# EAGLE board selector_wheel_1 (EAGLE 7.3.0)
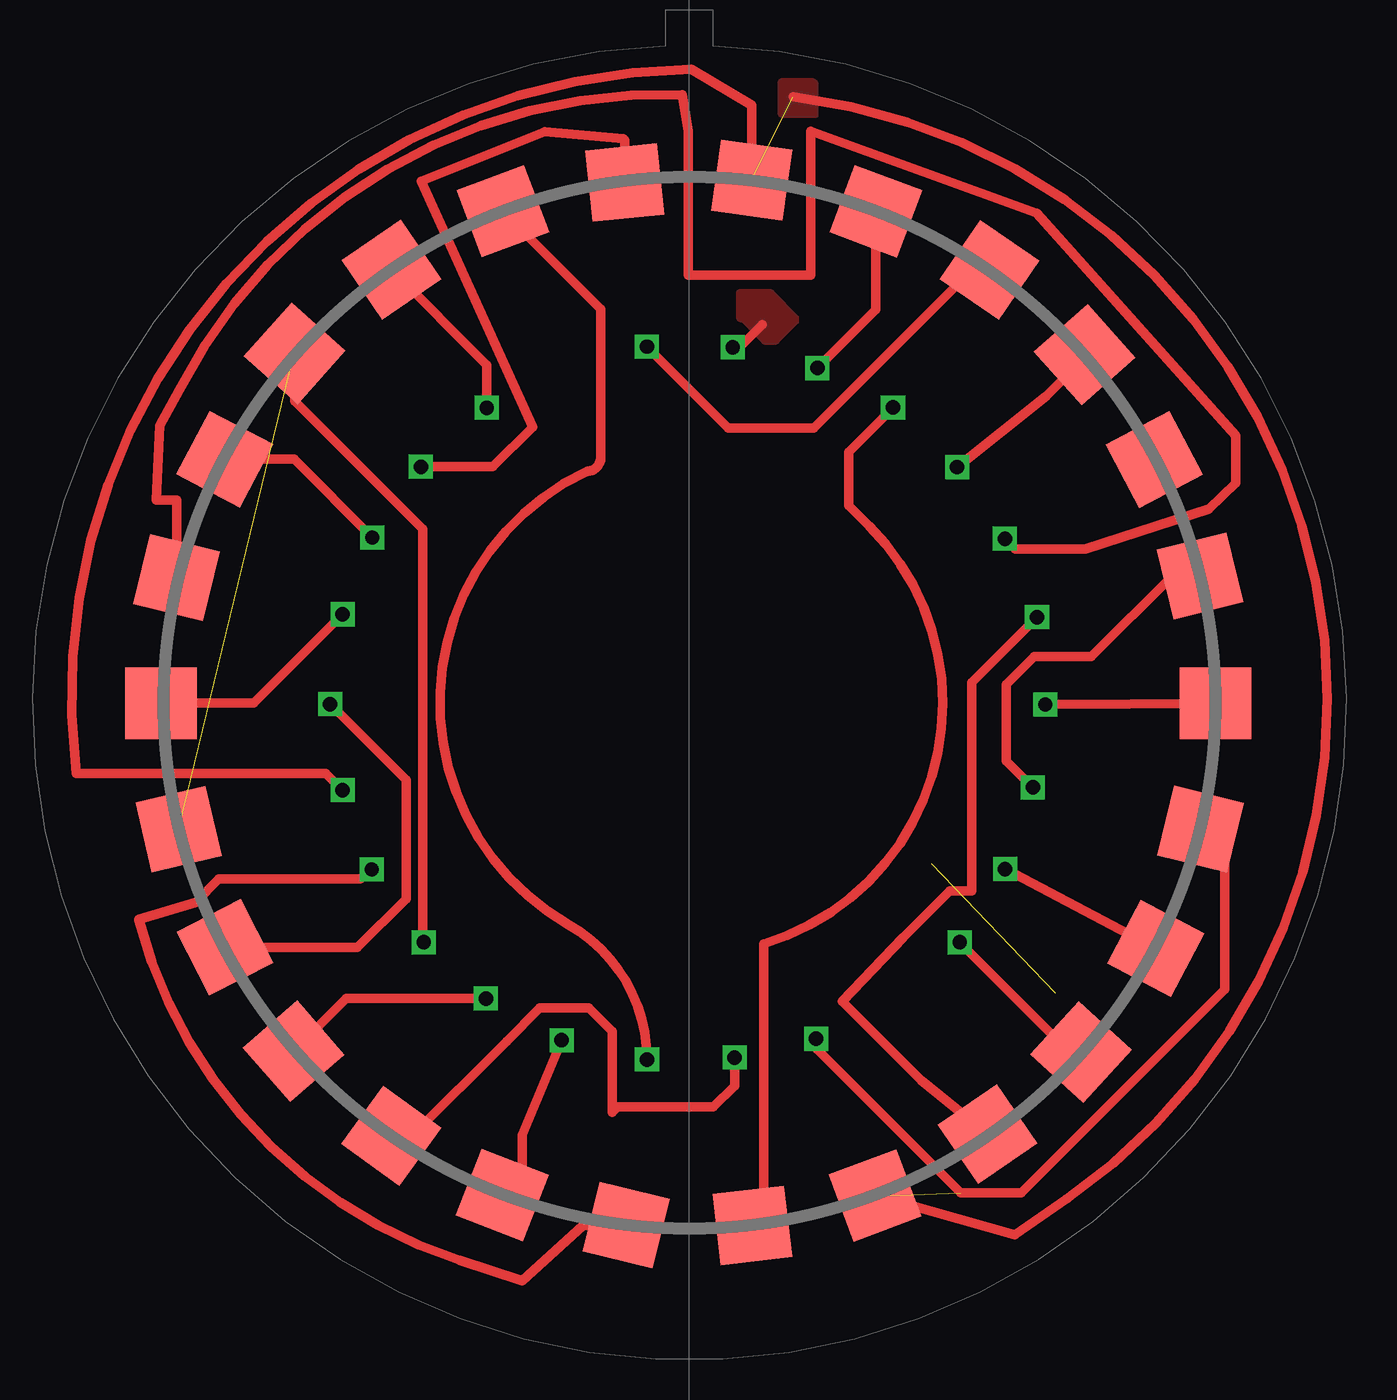
[diagram p0: board, top side]
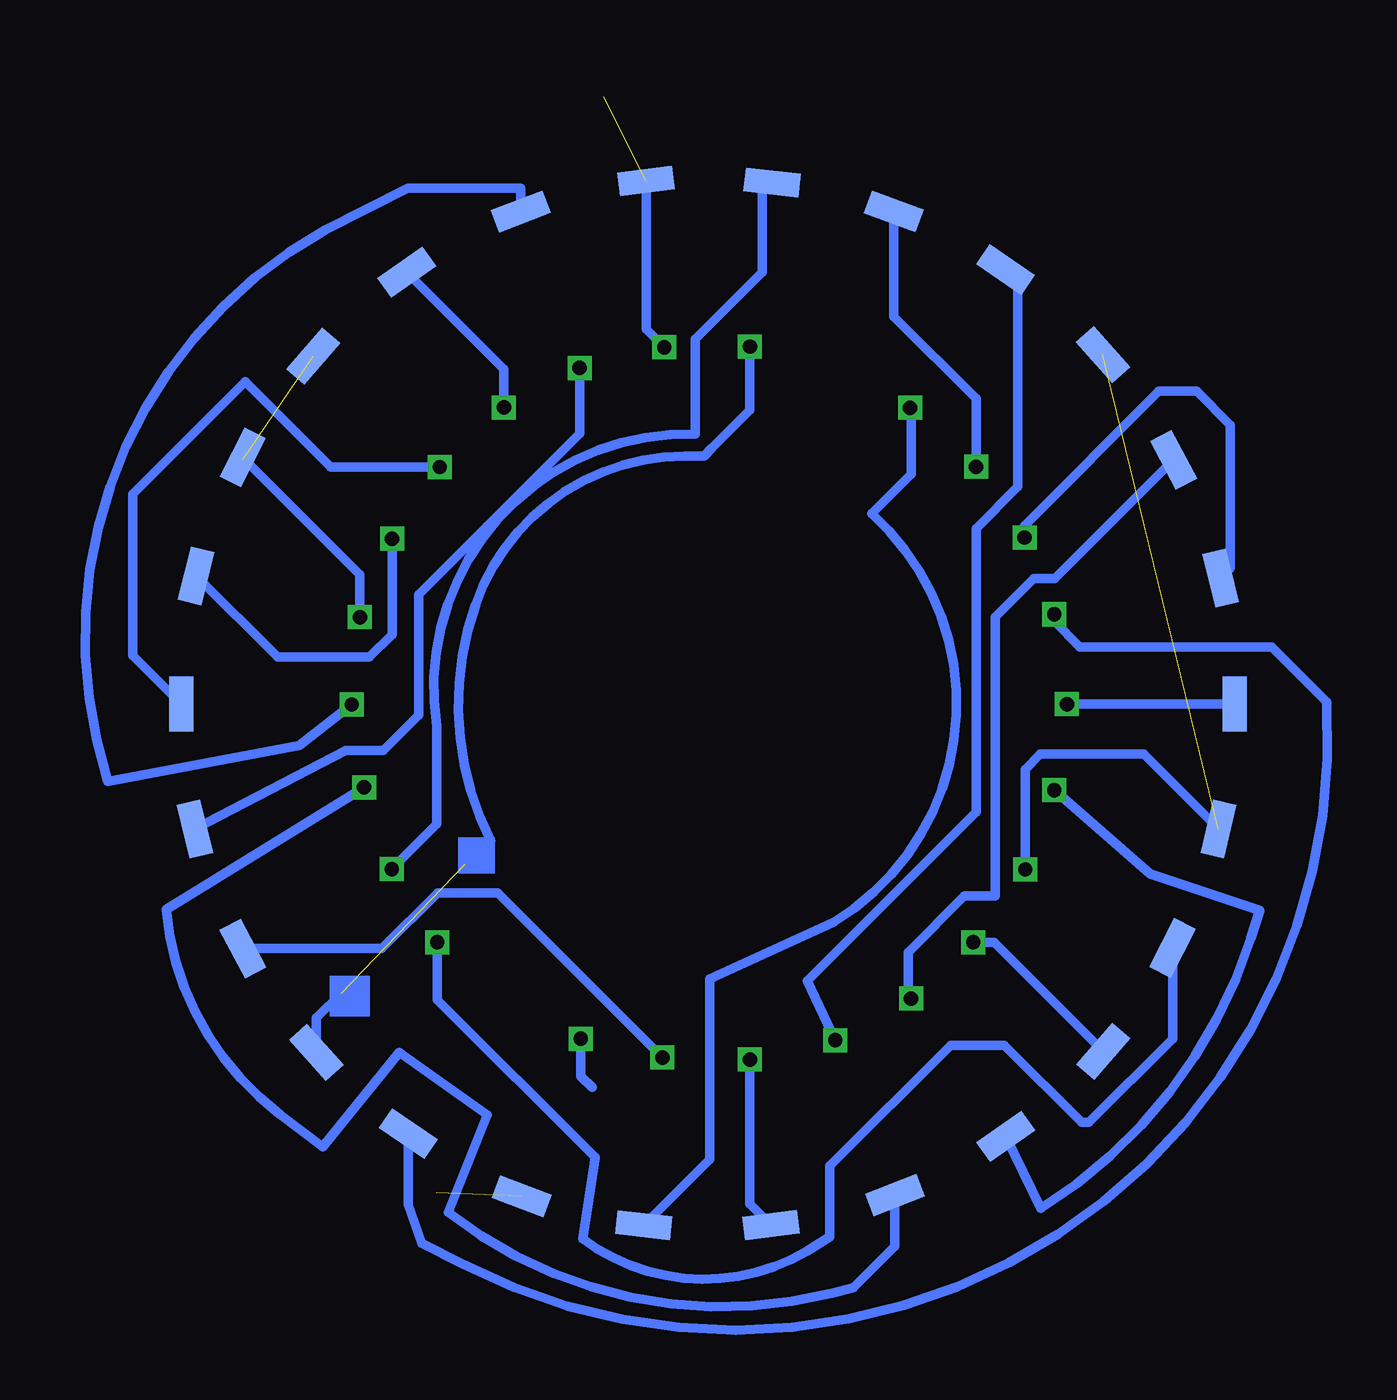
[diagram p1: board, bottom side, seen from below]

No outline drawn. Coordinates in mm, seen from the top.
Copper layers (1*16): Top 0.035mm / dielectric 1.5mm / Bottom 0.035mm
Design rules "default": minimum track width 10mil, minimum drill 24mil, track to track 8mil, track to pad 8mil, pad to pad 8mil, via to via 8mil, smd to smd 8mil, copper to edge 40mil, drill to drill 8mil, minimum pad ring 10mil, minimum via ring 8mil, stop-mask expansion 4mil, vias tented up to drill 0mil, thermal gap 10mil

## Footprints (pad centres in the part's own frame; a part is rotated, then mirrored left to right if it is on the bottom)
CONTACT = smd 3 x 3: P$1 0,0
SPRING = smd 2.3 x 1: P$1 0,0

## Placement (x,y rotation side)
U$1  CONTACT  [CONTACT]  52.01,29.97 0 top
U$2  CONTACT  [CONTACT]  51.36,35.31 103.9 top
U$3  CONTACT  [CONTACT]  49.44,40.18 117.8 top
U$4  CONTACT  [CONTACT]  46.53,44.57 41.7 top
U$5  CONTACT  [CONTACT]  42.56,48.11 145.6 top
U$6  CONTACT  [CONTACT]  37.8,50.56 69.5 top
U$7  CONTACT  [CONTACT]  7.89,29.98 0 top
U$8  CONTACT  [CONTACT]  27.29,51.77 95.9 top
U$9  CONTACT  [CONTACT]  49.51,19.71 332.2 top
U$10  CONTACT  [CONTACT]  51.38,24.71 346.1 top
U$11  CONTACT  [CONTACT]  46.38,15.37 137.6 top
U$12  CONTACT  [CONTACT]  42.48,11.95 304.4 top
U$13  CONTACT  [CONTACT]  32.64,8.13 276.6 top
U$14  CONTACT  [CONTACT]  37.77,9.38 290.5 top
U$15  CONTACT  [CONTACT]  22.17,9.39 248.8 top
U$16  CONTACT  [CONTACT]  27.36,8.14 346.1 top
U$17  CONTACT  [CONTACT]  13.44,15.42 221 top
U$18  CONTACT  [CONTACT]  17.53,11.87 54.2 top
U$19  CONTACT  [CONTACT]  17.54,48.12 304.4 top
U$20  CONTACT  [CONTACT]  22.2,50.57 290.5 top
U$21  CONTACT  [CONTACT]  13.48,44.62 318.3 top
U$22  CONTACT  [CONTACT]  10.56,40.19 332.2 top
U$23  CONTACT  [CONTACT]  8.63,24.71 193.2 top
U$24  CONTACT  [CONTACT]  8.54,35.23 346.1 top
U$25  CONTACT  [CONTACT]  10.57,19.76 207.1 top
U$26  CONTACT  [CONTACT]  32.61,51.86 82 top
U$27  SPRING  [SPRING]  52.02,29.95 90 bottom
U$28  SPRING  [SPRING]  51.39,35.31 76.1 bottom
U$29  SPRING  [SPRING]  49.45,40.27 242.9 bottom
U$30  SPRING  [SPRING]  46.5,44.51 229 bottom
U$31  SPRING  [SPRING]  42.59,48.02 215.1 bottom
U$32  SPRING  [SPRING]  37.81,50.56 201.2 bottom
U$33  SPRING  [SPRING]  7.94,29.94 90 bottom
U$34  SPRING  [SPRING]  27.3,51.77 353.4 bottom
U$35  SPRING  [SPRING]  49.44,19.71 117.8 bottom
U$36  SPRING  [SPRING]  51.45,24.71 103.9 bottom
U$37  SPRING  [SPRING]  46.37,15.36 131.7 bottom
U$38  SPRING  [SPRING]  42.52,11.96 145.6 bottom
U$39  SPRING  [SPRING]  32.67,8.13 173.4 bottom
U$40  SPRING  [SPRING]  37.78,9.34 159.5 bottom
U$41  SPRING  [SPRING]  22.16,9.39 201.2 bottom
U$42  SPRING  [SPRING]  27.35,8.14 187.3 bottom
U$43  SPRING  [SPRING]  13.45,15.41 229 bottom
U$44  SPRING  [SPRING]  17.53,11.85 215.1 bottom
U$45  SPRING  [SPRING]  17.54,48.12 145.6 bottom
U$46  SPRING  [SPRING]  22.21,50.56 159.5 bottom
U$47  SPRING  [SPRING]  13.46,44.57 131.7 bottom
U$48  SPRING  [SPRING]  10.5,40.17 117.8 bottom
U$49  SPRING  [SPRING]  8.62,24.71 256.8 bottom
U$50  SPRING  [SPRING]  8.54,35.22 103.9 bottom
U$51  SPRING  [SPRING]  10.55,19.74 242.9 bottom
U$52  SPRING  [SPRING]  32.57,51.84 187.3 bottom

## Library data of the parts
U$1-U$52 = enigma

## Nets
N$1: U$4.P$1 U$27.P$1
N$2: U$1.P$1 U$32.P$1
N$3: U$25.P$1 U$33.P$1
N$4: U$20.P$1 U$42.P$1
N$5: U$9.P$1 U$34.P$1
N$6: U$11.P$1 U$51.P$1
N$7: U$18.P$1 U$35.P$1
N$8: U$22.P$1 U$50.P$1
N$9: U$13.P$1 U$31.P$1
N$10: U$24.P$1 U$28.P$1
N$11: U$12.P$1 U$29.P$1
N$12: U$3.P$1 U$30.P$1
N$13: U$6.P$1 U$36.P$1
N$14: U$5.P$1 U$37.P$1
N$15: U$7.P$1 U$38.P$1
N$16: U$19.P$1 U$39.P$1
N$17: U$10.P$1 U$40.P$1
N$18: U$2.P$1 U$41.P$1
N$19: U$21.P$1 U$43.P$1
N$20: U$26.P$1 U$44.P$1
N$21: U$15.P$1 U$45.P$1
N$22: U$8.P$1 U$46.P$1
N$23: U$23.P$1 U$47.P$1
N$24: U$17.P$1 U$48.P$1
N$25: U$16.P$1 U$49.P$1
N$26: U$14.P$1 U$52.P$1

## Tracks (layer width: path | path; a pad name or v marks a point on that pad's centre or on a via)
N$1  (via drill 0.6)
  Top 0.406: U$4.P$1 45.89,43.92 45.89,43.8 44.92,42.84 v41.2,39.86
  Bottom 0.406: U$27.P$1 54.04,31.97 54.04,37.48 54.04,38.73 49.33,43.44 45.76,39.86 v41.2,39.86
N$2  (via drill 0.6)
  Top 0.406: v44.89,29.93 U$1.P$1
  Bottom 0.406: U$32.P$1 37.81,51.53 42.55,51.53 45.97,49.79 arc-79 55.09,26.71 47.09,28.2 v44.89,29.93
N$3  (via drill 0.6)
  Top 0.406: v14.97,29.94 18.14,26.76 18.14,21.79 16.11,19.76 U$25.P$1
  Bottom 0.406: U$33.P$1 v14.97,29.94
N$4  (via drill 0.6)
  Top 0.406: v28.23,15.07 arc60 24.96,20.7 arc-125 25.7,39.68 arc90 26.3,40.28 26.3,45.1 26.3,46.47 U$20.P$1
  Bottom 0.406: U$42.P$1 28.23,9.02 v28.23,15.07
N$5  (via drill 0.6)
  Top 0.406: U$9.P$1 v43.21,23.04
  Bottom 0.406: U$34.P$1 27.71,51.36 27.71,48.03 30.52,45.22 30.52,41.23 arc-101 41.33,29.02 41.33,24.92 v43.21,23.04
N$6  (via drill 0.6)
  Top 0.406: v41.31,19.97 45.91,15.37 U$11.P$1
  Bottom 0.406: U$51.P$1 10.55,15.93 14.04,12.43 14.35,12.43 17.59,15.67 19.82,15.67 24.89,10.61 24.89,7.64 25.84,7.04 arc67 35.23,7.56 34.7,10.97 41.31,17.57 v41.31,19.97
N$7  (via drill 0.6)
  Top 0.406: U$18.P$1 18.39,11.87 22.36,15.84 23.75,17.23 25.78,17.23 26.77,16.23 26.77,12.86 27,13.08 31,13.08 31.89,13.97 v31.89,15.15
  Bottom 0.406: v31.89,15.15 38.78,22.03 41.3,22.03 43.62,19.71 U$35.P$1
N$8  (via drill 0.6)
  Top 0.406: U$22.P$1 13.46,40.19 v16.73,36.91
  Bottom 0.406: v16.73,36.91 16.73,37.42 11.12,43.03 9.54,43.03 8.13,41.62 8.13,35.63 U$50.P$1
N$9  (via drill 0.6)
  Top 0.406: v38.52,42.36 36.66,40.5 36.66,38.33 36.66,38.26 37.52,37.4 arc-118 33.12,19.91 33.12,8.44 32.64,8.44 U$13.P$1
  Bottom 0.406: U$31.P$1 38.52,43.96 v38.52,42.36
N$10  (via drill 0.6)
  Top 0.406: U$24.P$1 8.54,38.47 7.69,38.47 7.83,41.6 8.66,43.08 arc-65 29.71,55.45 29.96,53.92 29.96,47.88 35.08,47.88 35.08,53.92 44.53,50.5 52.87,41.18 52.87,39.2 51.72,38.1 46.56,36.44 43.63,36.44 v43.2,36.87
  Bottom 0.406: v43.2,36.87 43.2,32.85 44.15,31.9 47.99,31.9 U$28.P$1
N$11  (via drill 0.6)
  Top 0.406: v44.54,33.58 41.82,30.85 41.82,22.12 40.88,22.12 38.94,20.18 36.4,17.49 39.7,14.19 42.25,12.12 41.97,11.85 42.38,11.85 U$12.P$1
  Bottom 0.406: v44.54,33.58 44.54,35.37 U$29.P$1
N$12  (1 unrouted)
N$13  (via drill 0.6)
  Top 0.406: U$6.P$1 37.8,46.46 v35.35,44.01
  Bottom 0.406: v35.35,44.01 35.35,41.25 39.24,37.36 42.08,34.53 42.08,29.49 43.57,28 45.15,28 U$36.P$1
N$14  (via drill 0.6)  (1 unrouted)
  Top 0.406: U$5.P$1 41.82,48.11 35.21,41.5 31.64,41.5 v28.23,44.91
  Bottom 0.406: v28.23,44.91 28.23,42.25 29.83,40.65 30.13,40.31 30.95,40.31 arc-71 39.71,34.12 arc-46 39.08,24.21 39.18,24.21 40.14,23.25 | U$37.P$1 46.37,16.8 45.33,17.84
N$15  (via drill 0.6)
  Top 0.406: v15.49,33.7 11.77,29.98 U$7.P$1
  Bottom 0.406: U$38.P$1 42.52,8.98 41.95,7.38 40.26,6.51 arc-121 4.09,30.02 6.41,32.34 14.42,32.34 15.49,33.41 v15.49,33.7
N$16  (via drill 0.6)
  Top 0.406: v21.52,42.34 21.52,44.14 U$19.P$1
  Bottom 0.406: U$39.P$1 29.91,10.89 29.91,18.44 24.73,20.81 arc-107 23.14,37.92 21.48,39.57 21.48,42.3 v21.52,42.34
N$17  (via drill 0.6)  (1 unrouted)
  Top 0.406: U$10.P$1 52.41,23.69 52.41,18.62 52.41,18.01 43.88,9.48 41.36,9.48 35.35,15.49 35.35,15.89 v35.3,15.94
  Bottom 0.406: U$40.P$1 37.77,9.38 | v35.3,15.94 35.3,14.37 34.83,13.89
N$18  (via drill 0.6)
  Top 0.406: v44.37,26.46 43.27,27.56 43.27,30.77 44.42,31.92 46.82,31.92 50.2,35.3 U$2.P$1
  Bottom 0.406: U$41.P$1 22.16,7.24 23.89,5.51 24.81,5.28 arc52 40.85,8.66 39.23,12.75 42.9,15.37 46.1,11.42 47.89,12.78 arc48 52.65,21.35 v44.37,26.46
N$19  (via drill 0.6)
  Top 0.406: v18.88,19.97 18.84,20.01 18.84,37.26 13.48,42.62 U$21.P$1
  Bottom 0.406: U$43.P$1 18.01,19.97 v18.88,19.97
N$20  (via drill 0.6)
  Top 0.406: U$26.P$1 32.61,55.02 30.08,56.5 arc96 4.35,27.04 14.79,27.04 v15.49,26.34
  Bottom 0.406: v15.49,26.34 11.49,22.83 6.9,21.3 7.27,20.14 arc40 16.07,8.84 U$44.P$1
N$21  (via drill 0.6)
  Top 0.406: U$15.P$1 23.01,10.23 23.01,11.91 v24.66,15.87
  Bottom 0.406: U$45.P$1 17.02,47.6 17.02,39.04 18.77,37.29 18.77,25.42 25.83,18.36 v24.66,15.87
N$22  (via drill 0.6)
  Top 0.406: v18.77,39.88 21.78,39.88 23.44,41.54 18.77,51.82 23.95,53.89 27.23,53.6 27.29,53.54 U$8.P$1
  Bottom 0.406: U$46.P$1 22.21,46.16 18.77,42.72 v18.77,39.88
N$23  (1 unrouted)
N$24  (via drill 0.6)
  Top 0.406: v21.48,17.62 15.64,17.62 U$17.P$1
  Bottom 0.406: U$48.P$1 15.47,35.2 16.36,35.2 17.97,33.58 17.97,21.92 19.25,21.92 21.61,19.56 21.61,17.74 v21.48,17.62
N$25  (via drill 0.6)
  Top 0.406: v16.71,23.02 16.73,23.13 16.22,22.63 10.32,22.63 9.34,21.65 6.95,20.93 arc57 20.39,6.66 23,5.8 25.57,8.14 U$16.P$1
  Bottom 0.406: v16.71,23.02 16.71,27.21 16.07,27.84 11.76,27.84 U$49.P$1
N$26  (via drill 0.6)  (1 unrouted)
  Top 0.406: U$14.P$1 43.62,7.72 45.78,9.23 arc138 34.34,55.37 | v31.81,44.88 32.1,44.88 33.05,45.83
  Bottom 0.406: U$52.P$1 32.57,45.63 v31.81,44.88
  pour Top: 32.18,47.11 32.15,47.11 32.15,46.11 32.25,46.11 33.18,45.18 33.59,45.18 34.45,46.04 33.37,47.12 32.12,47.12
  pour Top: 35.21,55.9 35.21,54.7 35.26,54.7 35.26,54.68 33.89,54.68 33.89,55.94 35.14,55.94
(copper drawn outside any net)
  shapes: Bottom area x2